# Altium PCB CZ201E_V2.0.PcbDoc
Units mm, origin at the board's own origin, x right, y up, seen from the top; angles counter-clockwise.
Board outline 58.8 x 55 mm, 2 copper layers (Top Layer, Bottom Layer); 61 components, 39 nets, 197 pads, 33 vias.
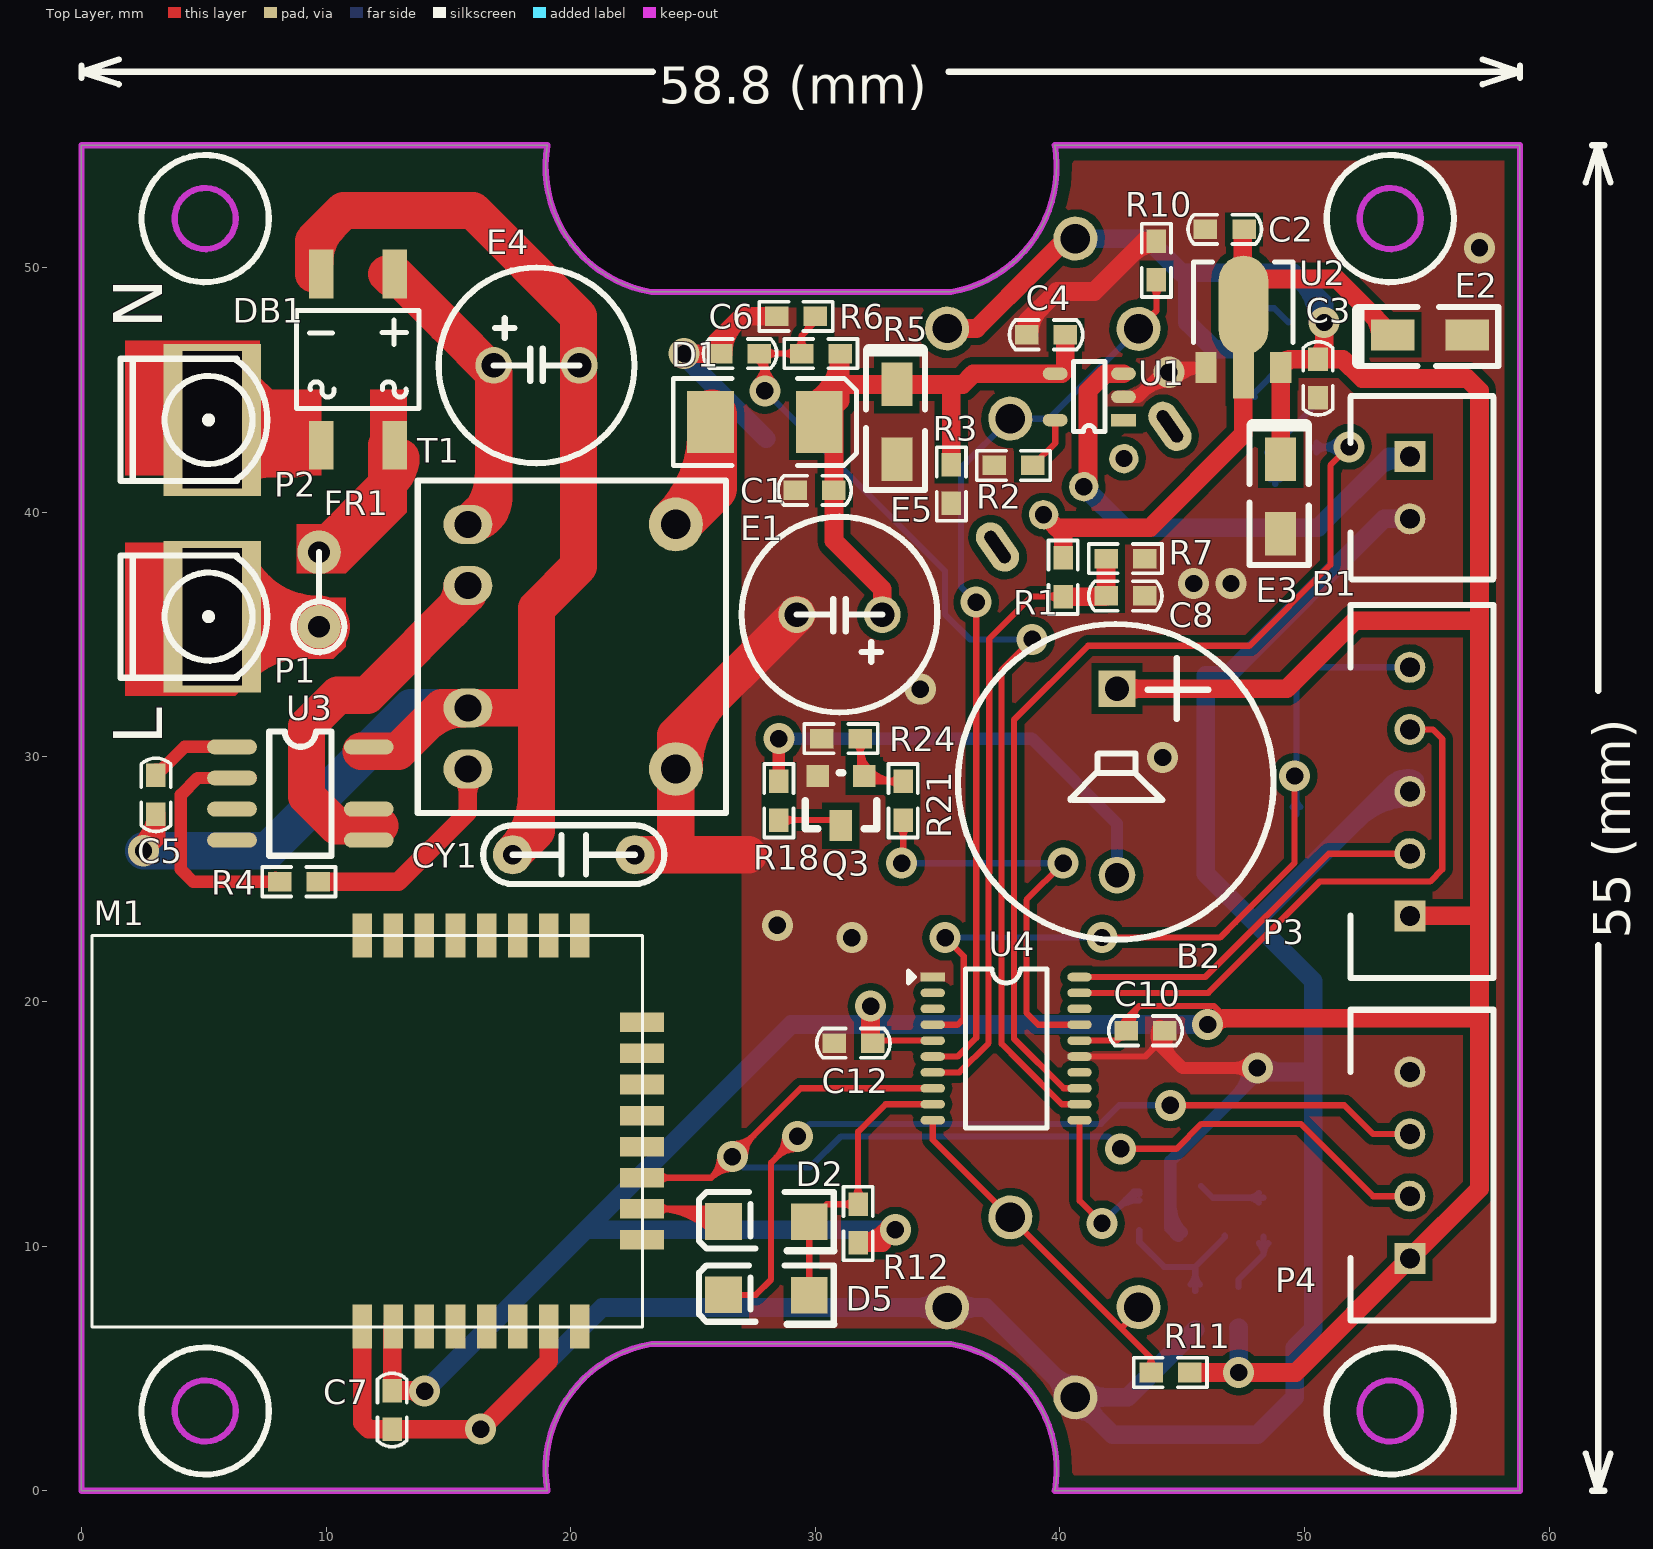
[diagram p0: Top Layer view]
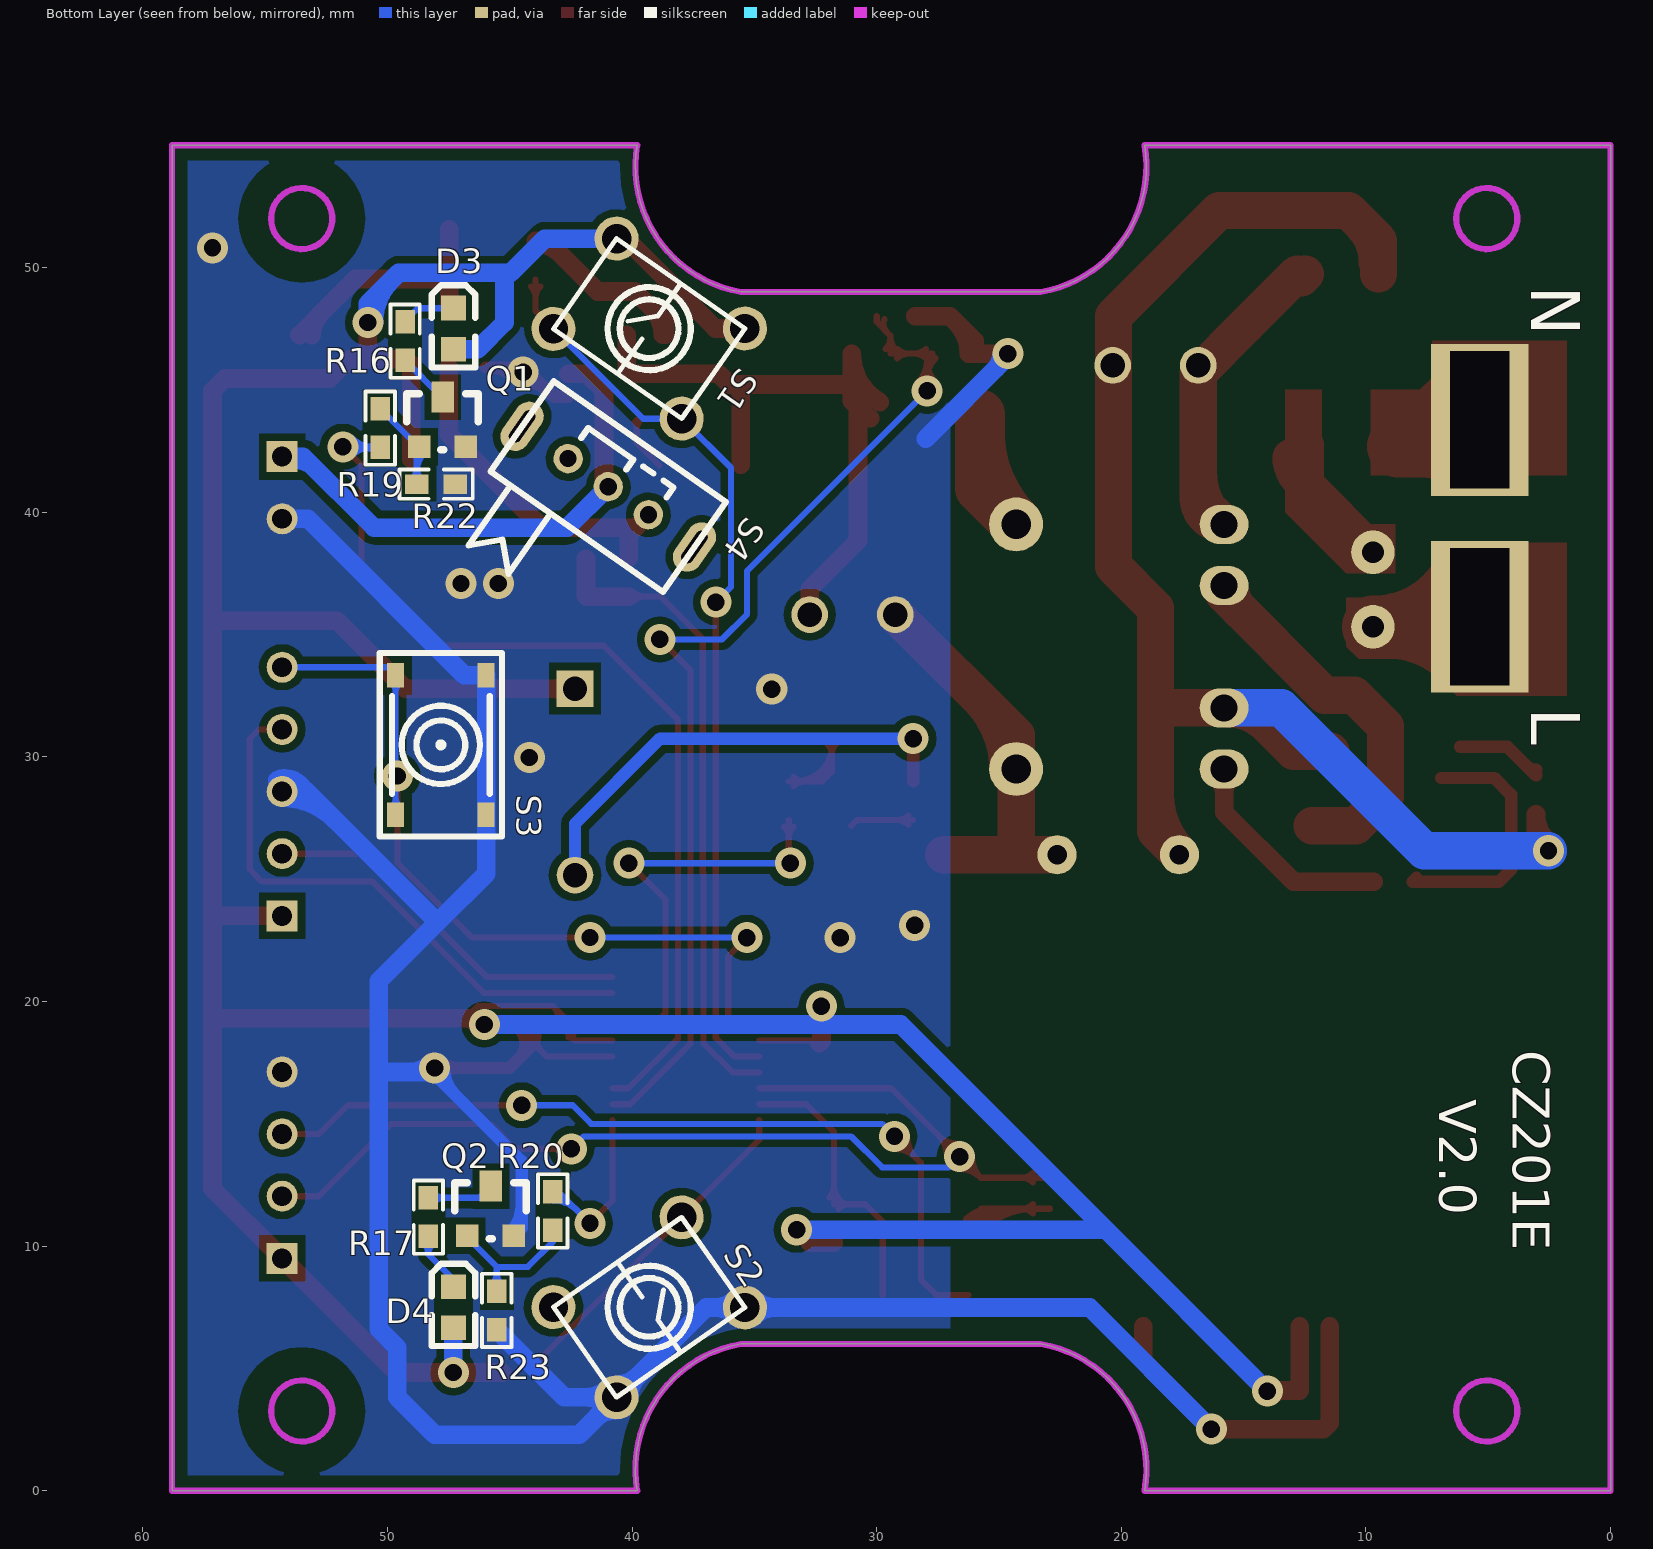
[diagram p1: Bottom Layer view, seen from below]

## Layer stack, top to bottom
Top Layer: signal copper 0.0356
Dielectric: dielectric 0.32, FR-4, Dk 4.8
Bottom Layer: signal copper 0.0356

## Board outline
0,0 0,55 19.05,55 ccw(c24.175,54.125) 23.3,49 35.54,49 ccw(c34.665,54.125) 39.79,55 39.8,55 58.8,55 58.8,0 39.8,0 39.79,0 ccw(c34.665,0.875) 35.54,6 23.3,6 ccw(c24.175,0.875) 19.05,0

## Design rules (kind name [scope] priority, off if disabled: settings)
Clearance "InPoygon to Keep-Out Layer" [InPolygon vs OnLayer('Keep-Out Layer')] p1: gap=0.5
Clearance "GND to Keep-Out Layer" [InNet('GND') vs OnLayer('Keep-Out Layer')] p2: gap=0.3
Clearance "GND to InPoygon" [InNet('GND') vs InPolygon] p3: gap=0.5
Clearance "InPoygon to All" [InPolygon] p4: gap=0.305
Clearance [All] p5: gap=0.254
HoleToHoleClearance [All] p1: gap=0 allowstackedmicrovias=TRUE
MinimumSolderMaskSliver [All] p1: minsoldermaskwidth=0
PolygonConnect IsVia [IsVia] p1: connectstyle=Direct reliefconductorwidth=0.254 reliefentries=4 polygonreliefangle="90 Angle"
PolygonConnect IsSMDPad [All] p2: connectstyle=Direct reliefconductorwidth=0.254 reliefentries=4 polygonreliefangle="90 Angle"
PolygonConnect [All] p3: connectstyle=Relief reliefconductorwidth=0.508 reliefentries=4 polygonreliefangle="90 Angle"
RoutingVias [All] p1: holewidth=0.711 width=1.27 viastyle="Through Hole" minholewidth=0.711 minwidth=1.27 maxholewidth=0.711 maxwidth=1.27
SilkToSilkClearance [All] p1: silktosilkclearance=0
SilkscreenOverComponentPads [All] p1: minsilkscreentomaskgap=0
SolderMaskExpansion [All] p1: expansion=0.102
Width [All] p1: maxlimit=2.54 minlimit=0.254 preferedwidth=0.254
24 further rules are at their usual default settings.

## Components (designator, comment, footprint, x,y, rotation, side; value= is the part's Value field where it differs from the comment)
B1 "3.7V" XH2.54-2P-BAT 54.3,41 r90 top locked
B2 "BUZZER" BEEZ 43.5,29 r0 top locked
C1 "100nF" 0603_CN 29.972,40.894 r180 top
C2 "100nF" 0603_CN 46.736,51.562 r180 top
C3 "100nF" 0603_CN 50.546,45.466 r270 top
C4 "100nF" 0603_CN 39.432,47.252 r180 top
C5 "1uF" 0603_CN 3.048,28.448 r270 top
C6 "100nF" 0603_CN 26.924,46.482 r180 top
C7 "100nF" 0603_CN 12.7,3.302 r90 top
C8 "100nF" 0603_CN 42.672,36.576 r0 top
C10 "100nF" 0603_CN 43.496,18.804 r0 top
C12 "100nF" 0603_CN 31.558,18.296 r180 top
CY1 "102M/1KV" CY-5MM 20.128,26 r0 top
D1 "SS24" DO-214AC(SMA) 27.94,43.688 r180 top
D2 "1N4148" LL-34 28,11 r0 top
D3 "Red" 0603_LED 47.3,47.5 r270 bottom locked
D4 "Green" 0603_LED 47.3,7.5 r270 bottom locked
D5 "1N4148" LL-34 28,8 r0 top
DB1 "MB10F" MB10F 11.3,46.236 r90 top
E1 "470uF/10V" CS_470uF/16V 30.988,35.814 r180 top
E2 "10uF/6.3V" 3216_E 55.118,47.244 r0 top
E3 "10uF/6.3V" 3216_E 49.022,40.64 r270 top
E4 "4.7uF/400V" CS_220uF/25V 18.604,46 r0 top
E5 "10uF/6.3V" 3216_E 33.336,43.696 r270 top
FR1 "10R/0.5W" R0.12L 9.714,35.314 r90 top
M1 "E18-MS1PA2-IPX" E18-MS1PA2-IPX 17.2,14.7 r180 top
P1 "L" CP3M-6*5*8.5MM 4.6,35.73 r270 top locked
P2 "N" CP3M-6*5*8.5MM 4.6,43.77 r270 top locked
P3 "SWD" XH2.54-5P 54.3,23.5 r90 top locked
P4 "ISP" XH2.54-4P 54.3,9.5 r90 top locked
Q1 "S8050" SOT-23 47.752,43.688 r180 bottom
Q2 "S8050" SOT-23 45.782,11.438 r180 bottom
Q3 "S8050" SOT-23 31.05,28.202 r180 top
R1 "1M" 0603_RN 40.132,37.338 r90 top
R2 "1.65K" 0603_RN 38.1,41.91 r0 top
R3 "1.2K" 0603_RN 35.56,41.148 r90 top
R4 "110K/1%" 0603_RN 8.89,24.892 r0 top
R5 "10K" 0603_RN 30.226,46.482 r0 top
R6 "20K" 0603_RN 29.21,48.006 r0 top
R7 "1M" 0603_RN 42.672,38.1 r180 top
R10 "100K" 0603_RN 43.942,50.292 r270 top
R11 "100K" 0603_RN 44.512,4.834 r0 top
R12 "100K" 0603_RN 31.75,10.922 r270 top
R16 "1K" 0603_RN 49.276,46.99 r90 bottom
R17 "1K" 0603_RN 48.322,11.184 r270 bottom
R18 "33R" 0603_RN 28.51,28.202 r90 top
R19 "10K" 0603_RN 50.292,43.434 r270 bottom
R20 "10K" 0603_RN 43.242,11.438 r90 bottom
R21 "10K" 0603_RN 33.59,28.202 r270 top
R22 "100K" 0603_RN 48.006,41.148 r0 bottom
R23 "100K" 0603_RN 45.528,7.374 r90 bottom
R24 "100K" 0603_RN 31.05,30.742 r0 top
S1 "SW-4" KEY-6*6MM-DIP 39.3,47.5 r215 bottom locked
S2 "SW-4" KEY-6*6MM-DIP 39.3,7.5 r325 bottom locked
S3 "SW-4" KEY-4*4*1.5MM-SMD 47.814,30.488 r90 bottom
S4 "SK12D07VG3" SK12D07VG3 41,41 r215 bottom locked
T1 "EE12.7 5+5(V)" "EE12.7 5+5(V)" 15.8,39.5 r0 top locked
U1 "TP4054" SOT-23-5 41.2,44.712 r180 top
U2 "HT7333-A" SOT-89 47.498,45.912 r0 top
U3 "LP3667B" SOP7 8.952,28.5 r0 top
U4 "STM32F030F4P6" TSSOP20 34.8,21 r0 top

## Footprints (in the part's own frame and the unit in brackets; to place one, negate y for a bottom-side part, rotate by r counter-clockwise, add the part's x,y. Pads: shape width x height; smd on the part's side, far side on the other; paste and mask are expansions set on the pad)
0603_CN [mm] "SMD Resistor"
  rect 0.96x0.8 smd: 1(-0.79,0) 2(0.79,0)
  silkscreen extent -1.5,-0.6 1.5,0.6
0603_LED [mil] "SMD LED"
  rect 40x40 smd: A(33,0) K(-33,0)
  silkscreen extent -70,-35 63,35
0603_RN [mm] "SMD Resistor"
  rect 0.96x0.8 smd: 1(-0.79,0) 2(0.79,0)
  silkscreen extent -1.5,-0.6 1.5,0.6
3216_E [mm] "SMD Tantalum Capacitor"
  rect 1.78x1.27 smd: 1(-1.525,0) 2(1.525,0)
  silkscreen extent -2.92,-1.27 2.79,1.14
BEEZ [mm]
  rect 1.5x1.5 hole 1: 1(-1.168,3.785)
  round 1.5 hole 1: 2(-1.168,-3.835)
  silkscreen extent -7.67,-6.48 5.23,6.43
CP3M-6*5*8.5MM [mm]
  rect 3x4 hole 2.4 square: 1(-1.6,0.75) 1(0,0.75) 1(1.6,0.75)
  silkscreen extent -2.5,-3 2.5,3
CS_220uF/25V [mm] "PTH  Electrolytic  Capacitor"
  round 1.5 hole 1: 1(-1.75,0) 2(1.75,0)
  silkscreen extent -4,-4 4,4
CS_470uF/16V [mm] "PTH  Electrolytic  Capacitor"
  round 1.5 hole 1: 1(-1.75,0) 2(1.75,0)
  silkscreen extent -4,-4 4,4
CY-5MM [mm]
  round 1.6 hole 0.8: 1(-2.5,0) 2(2.5,0)
  silkscreen extent -3.7,-1.2 3.7,1.2
DO-214AC(SMA) [mil] "SMD Diode"
  rect 75x100 smd: A(87.5,0) K(-87.5,0)
  silkscreen extent -147,-70 148,70
E18-MS1PA2-IPX [mm] "22.5mm*16mm*2.40mm-S"
  rect 0.8x1.8 smd: 1(5.716,7.987) 2(4.446,7.987) 3(3.176,7.987) 4(1.906,7.987) 5(0.636,7.987) 6(-0.634,7.987) 7(-1.904,7.987) 8(-3.174,7.987) 17(-3.174,-7.987) 18(-1.904,-7.987) 19(-0.634,-7.987) 20(0.636,-7.987) 21(1.906,-7.987) 22(3.176,-7.987) 23(4.446,-7.987) 24(5.716,-7.987)
  rect 1.8x0.8 smd: 9(-5.716,4.445) 10(-5.716,3.175) 11(-5.716,1.905) 12(-5.716,0.635) 13(-5.716,-0.635) 14(-5.716,-1.905) 15(-5.716,-3.175) 16(-5.716,-4.445)
  silkscreen extent -5.73,-8 16.77,8
"EE12.7 5+5(V)" [mm]
  oval 2x1.6 hole 1.1: 1(0,0) 2(0,-2.5) 4(0,-7.5) 5(0,-10)
  round 2.2 hole 1.2: 6(8.5,-10) 10(8.5,0)
  silkscreen extent -2.05,-11.8 10.55,1.8
KEY-4*4*1.5MM-SMD [mm] "SMD"
  rect 1x0.7 smd: 1(-2.85,1.85) 2(-2.85,-1.85) 3(2.85,-1.85) 4(2.85,1.85)
  silkscreen extent -3.75,-2.5 3.75,2.5
KEY-6*6MM-DIP [mm]
  round 1.8 hole 1.2: 1(-3.2,2.25) 2(-3.2,-2.25) 3(3.2,-2.25) 4(3.2,2.25)
  silkscreen extent -3.2,-2.25 3.2,2.25
LL-34 [mm] "SMD Diode"
  rect 1.5x1.5 smd: A(1.75,-0.008) K(-1.75,0.008)
  silkscreen extent -2.75,-1.19 2.75,1.21
MB10F [mm]
  rect 2x1 smd: 1(-3.5,1.5) 2(-3.5,-1.5) 3(3.5,-1.5) 4(3.5,1.5)
  silkscreen extent -2,-2.5 2,2.5
R0.12L [mil]
  round 70 hole 35: 1(0,0) 2(120,0)
  silkscreen extent -41,-41 120,41
SK12D07VG3 [mm]
  oval 1.2x2.2 hole 0.5 slot 1.5 at 90 deg: 0(-4.3,0.05) 0(4.3,0.05)
  round 1.2 hole 0.7: 1(-2,0.05) 2(0,0.05) 3(2,0.05)
  silkscreen extent -4.3,-5.2 4.3,2.3
SOP7 [mil]
  oval 80x24 smd: 1(-110,75) 2(-110,25) 3(-110,-25) 4(-110,-75) 5(110,-75) 6(110,-25) 7(110,75)
  silkscreen extent -50,-100 50,100
SOT-23 [mil] "SMD Triode Or Diode"
  rect 36x36 smd: 1(-37.5,-40) 2(37.5,-40)
  rect 36x50 smd: 3(0.5,40)
  silkscreen extent -58,-45 58,45
SOT-23-5 [mil]
  rect 40x20 smd: 1(-55,37.4)
  oval 40x20 smd: 2(-55,0) 3(-55,-37.4) 4(55,-37.4) 5(55,37.4)
  silkscreen extent -25,-57 26,55
SOT-89 [mil] "SMD Diode"
  rect 34x50 smd: 1(-60,0) 3(60,0)
  rect 34x100 smd: 2(0,0)
  oval 80x160 smd: 2(0,100)
  silkscreen extent -80,40 80,170
TSSOP20 [mm]
  rect 1x0.35 smd: 1(0,0)
  oval 1x0.35 smd: 2(0,-0.65) 3(0,-1.3) 4(0,-1.95) 5(0,-2.6) 6(0,-3.25) 7(0,-3.9) 8(0,-4.55) 9(0,-5.2) 10(0,-5.85) 11(6,-5.85) 12(6,-5.2) 13(6,-4.55) 14(6,-3.9) 15(6,-3.25) 16(6,-2.6) 17(6,-1.95) 18(6,-1.3) 19(6,-0.65) 20(6,0)
  silkscreen extent -1,-6.17 4.67,0.33
XH2.54-2P-BAT [mil]
  rect 50x50 hole 32: 1(50,0)
  round 50 hole 32: 2(-50,0)
  silkscreen extent -148,-135 148,95
XH2.54-4P [mil]
  rect 50x50 hole 32: 1(0,0)
  round 50 hole 32: 2(100,0) 3(200,0) 4(300,0)
  silkscreen extent -100,-135 400,95
XH2.54-5P [mil]
  rect 50x50 hole 32: 1(0,0)
  round 50 hole 32: 2(100,0) 3(200,0) 4(300,0) 5(400,0)
  silkscreen extent -100,-135 500,95

## Part data
B1: library part BATTERY
C1 C2 C3 C4 C5 C6 C7 C8 C10 C12 CY1: library part Cap1
D1: library part Diode-A, "SS14,SS24,SS34,M7"
D2 D5: library part Diode-B
D3 D4: library part LED
E1 E4: library part "Cap Pol1"
E2 E3 E5: library part "Cap Ta"
FR1 R1 R2 R3 R4 R5 R6 R7 R10 R11 R12 R16 R17 R18 R19 R20 R21 R22 R23 R24: library part Res1
P1 P2: library part "Header 1", "Header, 1-Pin"
P4: library part ISP_UART
Q1 Q2 Q3: library part 8050
U1: library part QX4054, "TP4054,LTC4054 ,PJ4054MR"
U2: library part HT7833, "HT7533; Output 500mA; Iq: 5uA, max= 7uA"
U3: "LP3667A, LP3667B, LP3667AH, LP3667BH"

## Via types
v1: diameter 1.27, hole 0.711, Top Layer to Bottom Layer, 33 vias

## Nets (pads, with @x,y where several pads share a name; then routed paths per layer and width w, separated by ;. In a path a pad name is that pad's centre, name@x,y a point inside that pad or via, vN(x,y) a via of type N, cw(c..) or ccw(c..) an arc to the next point about the centre after c; other vN are vias at no path point)
+3.3V: B2.1 C3.1 C7.2 C10.1 C12.1 D3.A D4.A E3.1 M1.2 P3.1 P4.1 R11.2 R12.2 S1.1 S1.4 U2.3 U4.5 U4.16 | length 193.4
  Top Layer w0.254: C12.1@32.292,18.296 C12.1 32.452,18.4 U4.5 ; U4.16 42.33,18.4 C10.1@42.706,18.776 ; C10.1@42.402,18.649 cw(c42.276,18.562) 42.384,18.454 cw(c42.576,18.262) C10.1@42.601,18.532 ; C10.1@42.566,18.722 cw(c43.044,18.9) 42.683,19.261 ; C10.1@42.566,19.039 ccw(c42.421,19.284) 42.706,19.284 ; C10.1 42.706,19.284 ; C10.1@42.804,18.811 cw(c43.451,19.052) 42.963,19.541 ; C10.1@42.846,19.039 cw(c42.991,19.284) 42.706,19.284 ; C10.1@43.042,18.899 cw(c43.858,19.204) 43.242,19.82 ; 46.798,19.312 46.29,19.82 43.242,19.82 ; 42.706,19.284 43.242,19.82
  Top Layer w0.762: M1.2@12.7,6.713 12.7,4.1 v1@14.004,4.1 ; 13.351,4.1 cw(c13.351,3.391) v1@13.852,3.892 ; v1(32.258,19.812) 32.258,18.386 C12.1 ; 32.738,10.132 R12.2 ccw(c31.75,11.743) v1@33.066,10.814 ; S1.4 36.586,47.508 39.116,50.038 40.257,51.179 S1.1 ; B2.1 49.276,32.785 52.051,35.56 57.15,35.56 ; B2.1@42.593,32.524 cw(c43.222,31.894) 43.222,32.785 cw(c43.222,33.675) B2.1@42.593,33.046 ; R11.2 v1(47.306,4.834) 49.634,4.834 P4.1 57.15,12.35 57.15,19.312 ; v1@46.27,18.96 cw(c46.798,18.741) 46.798,19.312 57.15,19.312 ; E3.1 U2.3 49.365,46.256 C3.1 ; U2.3@49.058,46.08 cw(c49.483,45.654) 49.483,46.256 ; C3.1@50.533,46.349 ccw(c49.887,46.995) 50.8,46.995 ; v1(50.8,47.752) 50.8,46.51 C3.1 ; P3.1 57.15,23.5 ; C3.1 51.562,46.256 52.352,45.466 56.642,45.466 57.15,44.958 57.15,35.56 ; 57.15,19.312 57.15,23.5 ; 57.15,23.5 57.15,35.56
  Bottom Layer w0.762: v1(14.032,4.072) 20.603,10.643 ; v1(33.274,10.668) 20.628,10.668 29.018,19.058 v1(46.036,19.058) ; S1.1 43.563,51.179 44.958,49.784 49.53,49.784 50.8,48.514 v1(50.8,47.752) ; 45.212,49.53 45.212,47.752 46.302,46.662 D3.A ; D4.A 47.306,6.656 v1(47.306,4.834) ; 49.828,49.486 cw(c48.093,47.752) v1@50.546,47.752
+5V: C1.1 C4.1 D1.K E1.1 E5.1 R3.2 R5.2 U1.4 | length 29.5
  Top Layer w0.762: D1.K@29.875,44.5 ccw(c28.723,46.482) R5.2 31.016,44.542 30.762,44.288 C1.1 30.762,38.834 32.738,36.858 E1.1 ; D1.K@30.258,43.841 ccw(c29.493,45.158) 31.016,45.158 ; 31.261,45.221 E5.1 35.56,45.221 ; R3.2 35.56,45.221 ; C4.1 40.222,45.817 40.067,45.662 U1.4 38.862,45.662 36.462,45.662 36.021,45.221 35.56,45.221
+BAT: B1.1 S4.2 U1.3 | length 23
  Top Layer w0.762: S4.2 41.148,41.218 41.148,44.958 41.852,45.662 U1.3
  Bottom Layer w0.762: S4.2 42.642,39.37 46.482,39.37 ; 47.244,39.37 46.482,39.37 ; 53.019,41.843 cw(c53.744,41.118) B1.1@54.19,42.041 ; B1.1 53.446,42.27 50.546,39.37 46.482,39.37
+BAT_OUT: C2.1 E2.1 R1.2 S4.3 U2.2 | length 25.2
  Top Layer w0.762: S4.3 39.857,39.37 ; R1.2 40.132,39.095 39.857,39.37 ; C2.1@47.47,51.562 U2.2@47.47,49.53 ; U2.2@47.498,45.913 47.498,43.18 43.688,39.37 41.402,39.37 39.857,39.37 ; U2.2@47.498,48.452 47.47,48.48 U2.2@47.47,49.53 ; 52.723,48.115 cw(c51.853,47.244) E2.1@53.084,47.244 ; E2.1 52.324,48.514 51.308,49.53 U2.2@47.47,49.53
BAT_VOL: C8.1 R1.1 R7.2 U4.7 | length 27.4
  Top Layer w0.254: U4.7 35.882,17.1 37.084,18.302 37.084,25.233 37.105,25.254 37.105,33.274 37.105,34.036 37.105,34.819 38.834,36.548 R1.1 ; R1.1@39.939,36.355 ccw(c39.473,35.889) 39.473,36.548 ccw(c39.473,37.207) R1.1@39.939,36.741
  Top Layer w0.762: R1.1 41.854,36.548 C8.1 R7.2
BUZZER: R21.2 U4.17 | length 18.5
  Top Layer w0.254: R21.2@33.397,27.139 cw(c32.931,26.673) 33.59,26.673 cw(c34.249,26.673) R21.2@33.783,27.139 ; v1(33.528,25.654) 33.59,25.716 R21.2 ; v1(40.132,25.654) 38.629,24.151 38.629,19.537 39.116,19.05 U4.17
  Bottom Layer w0.254: v1(33.528,25.654) v1(40.132,25.654)
E18_UART_RX: D2.K M1.10 | length 12
  Top Layer w0.254: M1.10 25.733,11.525 D2.K ; M1.10@23.497,11.525 cw(c23.497,8.254) D2.K@25.809,10.567 ; M1.10@23.609,11.332 cw(c24.075,10.866) 24.075,11.525 cw(c24.075,12.184) M1.10@23.609,11.718 ; 24.11,11.525 cw(c24.11,8.868) D2.K@25.989,10.747 ; 24.723,11.525 cw(c24.723,9.481) D2.K@26.169,10.926 ; 25.336,11.525 cw(c25.336,10.094) D2.K@26.348,11.106
GND: B1.2 C1.2 C2.2 C3.2 C4.2 C6.2 C7.1 C8.2 C10.2 C12.2 CY1.2 E1.2 E2.2 E3.2 E5.2 M1.1 M1.7 P3.3 P4.4 Q1.2 Q2.2 Q3.2 R2.1 R3.1 R6.1 R7.1 R10.1 R22.1 R23.1 R24.1 S2.1 S2.4 S3.2 S3.3 T1.6 U1.2 U2.1 U4.1 U4.15 | length 201.3
  Top Layer w0.254: U4.15 43.486,17.75 44.014,18.278 C10.2@44.286,18.55 ; 43.653,17.917 ccw(c42.946,18.624) C10.2@43.936,18.765 ; 44.012,18.276 ccw(c43.575,18.714) C10.2@44.187,18.801
  Top Layer w0.508: U1.2 43.188,44.712 44.389,45.913 U2.1 ; U1.2@42.851,44.712 ccw(c42.851,45.526) 43.426,44.95 ; 43.366,44.89 cw(c44.45,43.806) v1@44.45,45.339 ; 44.014,18.278 45.012,17.28 v1(48.068,17.28) ; C10.2@44.069,19.012 ccw(c44.623,18.624) 44.145,18.147 ; C10.2@44.486,18.72 ccw(c45.126,18.272) 44.573,17.719 ; v1@44.719,45.451 cw(c45.835,44.335) U2.1@45.835,45.913 ; v1@47.799,17.011 ccw(c47.148,16.36) 47.148,17.28 ccw(c47.148,18.2) v1@47.799,17.549
  Top Layer w0.762: M1.1 11.484,2.782 11.746,2.52 v1(16.318,2.52) 19.104,5.306 M1.7 ; v1(24.638,46.482) C6.2 26,46.616 26,47 27.006,48.006 R6.1 ; C6.2@26.233,46.482 cw(c28.046,46.482) 26.764,47.764 ; C4.2@38.642,47.282 C4.2 38.642,47.786 39.878,49.022 41.402,49.022 43.462,51.082 R10.1 ; C4.2@38.741,47.252 cw(c40.269,47.252) 39.189,48.333 ; 42.954,50.574 cw(c43.942,49.585) R10.1@43.942,50.983 ; 43.222,50.842 cw(c43.79,50.274) R10.1@43.938,51.063
  Top Layer w1.524: CY1.2 24.384,26 ; T1.6@24.638,29.5 cw(c28.776,29.5) 25.85,32.426 ; 27.27,26 24.384,26 ; E1.2 24.3,30.876 T1.6 24.3,26.084 24.384,26
  Bottom Layer w0.508: 44.512,11.679 ccw(c46.087,11.679) Q2.2@44.973,10.566 ; Q2.2 44.512,10.74 44.512,13.47 v1@48.068,17.026 ; 47.238,16.196 ccw(c46.154,17.28) v1@47.687,17.28
  Bottom Layer w0.762: v1(16.318,2.52) v1(16.318,2.52) 21.292,7.492 S2.1 36.96,7.492 S2.4 ; v1(24.638,46.482) 24.638,46.362 28,43 ; v1@24.892,46.482 ccw(c25.795,46.482) 25.156,45.844 ; S2.1@35.021,7.125 ccw(c34.135,6.239) 34.135,7.492 ccw(c34.135,8.745) S2.1@35.021,7.859 ; S2.1@35.755,7.125 cw(c36.641,6.239) 36.641,7.492 cw(c36.641,8.745) S2.1@35.755,7.859 ; S2.4@40.112,3.821 ccw(c38.859,3.821) 39.745,4.707 ccw(c40.631,5.593) S2.4@40.631,4.34 ; S2.4@40.631,3.302 cw(c40.631,2.049) 41.517,2.935 cw(c42.403,3.821) S2.4@41.15,3.821 ; S2.4@40.998,3.454 cw(c41.884,2.568) 41.884,3.821 cw(c41.884,5.074) S2.4@40.998,4.188 ; R23.1 42.765,3.821 S2.4 ; v1@48.068,17.026 48.162,17.12 50.354,17.12 ; v1@48.248,17.46 ccw(c49.067,18.279) 49.067,17.12 ; 52.159,27.439 cw(c54.3,25.299) P3.3@54.3,28.326 ; 52.8,28.08 cw(c53.696,27.184) P3.3@54.199,28.347 ; 53.46,28.74 cw(c54.3,27.9) P3.3@54.3,29.088 ; 53.593,28.873 cw(c54.175,28.291) P3.3@54.502,29.046 ; P3.3 53.3,28.58 47.974,23.254 47.974,23.216 ; B1.2 53.246,39.73 46.854,33.338 S3.3 S3.2 45.964,25.226 47.974,23.216 ; S2.4 42.158,2.294 48.068,2.294 49.592,3.818 49.592,5.85 50.354,6.612 50.354,17.12 ; 47.974,23.216 50.354,20.836 50.354,17.12
  other v1: 31.496,22.606 28.448,23.114 44.196,29.972 34.29,32.766 45.466,37.084 46.99,37.084 44.45,45.72 57.15,50.8
GND_P: C5.2 CY1.1 DB1.4 E4.2 T1.4 U3.7 | length 70.5
  Top Layer w0.762: v1@2.391,26.367 ccw(c1.453,27.658) C5.2 3.048,26.67 v1(2.54,26.162)
  Top Layer w1.524: DB1.4@9.484,49.736 9.484,51.086 10.73,52.332 15.994,52.332 20.32,48.006 20.32,43.942 20.32,37.784 18.604,36.068 18.604,32 ; DB1.4@9.538,50.236 cw(c11.72,50.236) 10.177,51.779 ; U3.7@11.43,30.226 12.954,30.226 14.728,32 T1.4 18.604,32 ; 14.047,31.319 cw(c15.6,29.765) T1.4@15.6,31.962 ; CY1.1@17.601,26.027 ccw(c15.18,28.448) 18.604,28.448 ; CY1.1 18.604,26.976 18.604,32
  Bottom Layer w1.524: v1(2.54,26.162) 7.624,26.162 13.462,32 T1.4
ISP_UART_RX: D5.K P4.3 | length 36.5
  Top Layer w0.254: D5.K 27.566,8.008 28.194,8.636 28.194,13.408 v1(29.272,14.486) ; v1@28.764,14.486 cw(c27.538,14.486) 28.405,13.619 cw(c29.272,12.752) v1@29.272,13.978 ; v1(44.512,15.756) 51.624,15.756 52.8,14.58 P4.3
  Bottom Layer w0.254: v1(29.272,14.486) 29.78,14.994 41.664,14.994 42.426,15.756 v1(44.512,15.756)
KEY1: R10.2 S1.2 S1.3 U4.6 | length 38.6
  Top Layer w0.254: U4.6 35.814,17.75 36.576,18.512 v1(36.576,36.322) ; S1.2@43.214,47.495 S1.2 43.942,48.223 R10.2 ; R10.2@43.749,49.229 cw(c43.283,48.763) 43.942,48.763 cw(c44.601,48.763) R10.2@44.135,49.229
  Bottom Layer w0.254: v1(36.576,36.322) 35.954,36.944 35.954,41.806 S1.3 39.541,43.821 S1.2
KEY2: R11.1 S2.2 S2.3 U4.10 | length 16
  Top Layer w0.254: U4.10 34.8,14.348 S2.2 42.508,6.64 ; S2.3 43.212,7.344 42.508,6.64 ; R11.1@43.545,5.042 ccw(c43.217,5.426) 43.722,5.426 ; R11.1 43.722,5.426 ; R11.1@43.899,5.042 cw(c44.227,5.426) 43.722,5.426 ; 42.508,6.64 43.722,5.426
L: FR1.1 P1.1 | length 16.3
  Top Layer w2.54: P1.1@3.843,36.187 ccw(c5.344,37.042) P1.1@5.344,35.314 ; P1.1@5.05,35.73 5.466,35.314 FR1.1 cw(c9.714,39.53) P1.1@6.05,37.444 ; P1.1@6.013,33.967 cw(c9.264,30.716) FR1.1@9.264,35.314 ; P1.1@6.013,35.893 ccw(c7.41,37.29) 7.41,35.314
LED1: R19.2 U4.13 | length 42.3
  Top Layer w0.254: U4.13 40.148,16.45 38.121,18.477 38.121,31.517 41.148,34.544 47.752,34.544 51.054,37.846 51.054,41.91 v1(51.816,42.672)
  Bottom Layer w0.254: R19.2 51.788,42.644 v1(51.816,42.672) ; R19.2@50.485,42.451 cw(c50.951,41.985) 50.951,42.644 cw(c50.951,43.303) R19.2@50.485,42.837 ; R19.2@50.522,42.644 ccw(c50.522,43.966) v1@51.457,43.031 ; R19.2@50.657,42.644 cw(c50.657,41.513) v1@51.457,42.313 ; 51.135,42.644 ccw(c51.135,43.353) v1@51.636,42.852
LED2: R20.2 U4.11 | length 8.4
  Top Layer w0.254: U4.11 40.8,11.848 v1(41.718,10.93)
  Bottom Layer w0.254: v1(41.718,10.93) 43.016,12.228 R20.2 ; 42.254,11.466 cw(c43.242,10.477) R20.2@43.242,11.875 ; 42.687,11.899 cw(c43.242,11.344) R20.2@43.242,12.129
N: DB1.1 P2.1 | length 8.9
  Top Layer w2.54: P2.1@5.05,43.77 6.14,42.68 8.698,42.68 cw(c8.698,46.182) P2.1@6.026,43.919 ; P2.1@6.013,42.007 cw(c7.637,40.383) 7.637,42.68
NetB2_2: B2.2 R18.2 | length 19.4
  Top Layer w0.508: R18.2 v1(28.51,30.742)
  Bottom Layer w0.508: v1@28.256,30.488 v1@28.51,30.488 ; v1(28.51,30.742) 30.988,30.742 33.336,30.742 38.854,30.742 42.332,27.264 B2.2
NetC5_1: C5.1 U3.1 | length 4
  Top Layer w0.508: C5.1 4.215,30.405 4.572,30.405 U3.1 ; C5.1@3.048,29.464 ccw(c3.048,30.01) C5.1@3.434,29.624
NetD1_A: D1.A T1.10 | length 9.2
  Top Layer w2.032: T1.10@24.241,39.559 ccw(c20.525,43.275) D1.A@25.78,43.275 ; T1.10 25.78,40.979 D1.A@25.78,44
NetD3_K: D3.K R16.2 | length 2.4
  Bottom Layer w0.254: D3.K@47.37,48.268 D3.K 48.76,48.338 49.297,47.801 R16.2@49.338,47.76
NetD4_K: D4.K R17.2 | length 3.5
  Bottom Layer w0.254: D4.K 47.3,8.638 48.322,9.66 ; R17.2@48.13,10.12 cw(c47.675,9.66) 48.322,9.66 ; R17.2 48.322,9.66 ; R17.2@48.514,10.12 ccw(c48.969,9.66) 48.322,9.66
NetDB1_2: DB1.2 FR1.2 | length 6.5
  Top Layer w1.524: FR1.2 12.484,41.132 DB1.2@12.484,42.736 ; 12.69,41.338 ccw(c11.792,42.236) DB1.2@13.062,42.236
NetDB1_3: DB1.3 E4.1 T1.1 | length 16.5
  Top Layer w1.524: DB1.3@12.484,49.736 DB1.3@12.642,49.578 ; DB1.3 14.885,47.651 16.854,45.682 16.854,40.554 ; T1.1 16.854,40.554 ; T1.1@15.973,39.527 ccw(c13.847,41.653) 16.854,41.653 ; T1.1@15.994,39.537 ccw(c15.823,40.554) 16.854,40.554 ; 16.854,45.22 E4.1@16.854,45.366
NetQ1_1: Q1.1 R19.1 R22.2 | length 6
  Bottom Layer w0.254: Q1.1@48.471,42.439 cw(c47.686,41.654) 48.796,41.654 ; R22.2@48.603,41.341 ccw(c48.137,41.807) 48.796,41.807 ccw(c49.455,41.807) R22.2@48.989,41.341 ; R22.2 48.796,42.728 R19.1 ; 48.796,42.096 cw(c49.281,42.096) Q1.1@48.938,42.439
NetQ1_3: Q1.3 R16.1 | length 2.3
  Bottom Layer w0.254: Q1.3 Q1.3@47.78,44.704 ; Q1.3@47.97,44.704 Q1.3@47.78,44.704 ; R16.1 Q1.3@47.78,44.704
NetQ2_1: Q2.1 R20.1 R23.2 | length 7
  Bottom Layer w0.254: R20.1 43.242,10.168 44.258,9.152 45.528,9.152 ; R23.2@45.335,8.437 ccw(c44.869,8.903) 45.528,8.903 ccw(c46.187,8.903) R23.2@45.721,8.437 ; R23.2 45.528,9.152 ; Q2.1 46.735,10.359 45.528,9.152
NetQ2_3: Q2.3 R17.1 | length 3.8
  Bottom Layer w0.254: Q2.3 46.249,11.974 R17.1 ; R17.1@48.129,11.781 ccw(c47.663,11.315) 47.663,11.974 ccw(c47.663,12.633) R17.1@48.129,12.167
NetQ3_1: Q3.1 R21.1 R24.2 | length 9
  Top Layer w0.254: R24.2@31.647,30.549 cw(c31.181,30.083) 31.84,30.083 cw(c32.499,30.083) R24.2@32.033,30.549 ; 31.84,29.794 ccw(c32.579,29.794) 32.056,29.272 ccw(c32.732,29.948) 32.732,28.992 ; R24.2@31.84,30.407 ccw(c33.192,30.407) 32.236,29.451 ccw(c33.345,30.561) R21.1@33.345,28.992 ; R24.2 31.84,29.381 32.229,28.992 R21.1 ; R21.1@33.397,28.799 ccw(c32.931,28.333) 32.931,28.992 ccw(c32.931,29.651) R21.1@33.397,29.185
NetQ3_3: Q3.3 R18.1 | length 3.7
  Top Layer w0.254: R18.1 30.811,27.412 Q3.3 ; R18.1@28.703,27.219 cw(c29.169,26.753) 29.169,27.412 cw(c29.169,28.071) R18.1@28.703,27.605
NetR2_2: R2.2 U1.5 | length 2.7
  Top Layer w0.254: R2.2 39.803,42.823 U1.5 ; U1.5@39.713,43.672 cw(c39.496,43.455) 39.803,43.455 cw(c40.11,43.455) U1.5@39.893,43.672
NetR4_1: R4.1 U3.2 | length 10.7
  Top Layer w0.508: U3.2@6.933,29.135 U3.2 4.751,29.135 4.064,28.448 4.064,25.4 4.572,24.892 R4.1 R4.1@7.936,25.056
NetR4_2: R4.2 T1.5 | length 10.6
  Top Layer w0.762: R4.2 12.954,24.892 15.8,27.738 T1.5 ; T1.5@15.504,29.204 cw(c14.788,28.488) 15.8,28.488 cw(c16.812,28.488) T1.5@16.096,29.204
NetT1_2: T1.2 U3.5 U3.6 | length 16.7
  Top Layer w1.524: 12.192,27.178 10.414,27.178 9.206,28.386 9.206,31.25 10.476,32.52 11.684,32.52 15.8,36.636 T1.2 ; 15.136,35.972 ccw(c14.109,37) T1.2@15.562,37
NRST: P3.5 S3.1 S3.4 U4.4 | length 38.5
  Top Layer w0.254: U4.4 35.814,19.05 36.068,19.304 36.068,21.844 v1(35.306,22.606) ; v1(41.718,22.614) 46.544,22.614 47.171,23.241 ; 46.798,22.868 47.171,23.241 ; v1(49.592,29.218) 49.592,25.662 47.171,23.241
  Bottom Layer w0.254: v1(35.306,22.606) 35.314,22.614 37.084,22.614 ; 36.13,22.614 37.084,22.614 ; v1(41.718,22.614) 37.084,22.614 ; S3.1@49.506,27.946 ccw(c49.126,28.326) 49.664,28.326 ccw(c50.202,28.326) S3.1@49.822,27.946 ; S3.4@49.506,33.03 cw(c49.126,32.65) 49.664,32.65 cw(c50.202,32.65) S3.4@49.822,33.03 ; S3.1 S3.4 49.986,33.66 52.07,33.66 ; 52.8,33.66 52.07,33.66 ; P3.5 53.594,33.66 52.07,33.66
PWR_STATE: C6.1 R5.1 R6.2 U4.12 | length 51.5
  Top Layer w0.254: v1@27.581,45.317 ccw(c26.714,46.184) 27.94,46.184 ccw(c29.166,46.184) v1@28.299,45.317 ; C6.1@27.601,46.289 cw(c26.782,45.47) v1@27.94,45.47 ; C6.1@27.781,46.469 cw(c27.396,46.084) C6.1@27.94,46.084 ; v1(27.94,44.958) 27.94,46.256 C6.1 R5.1 29.436,47.216 30,47.78 R6.2 ; C6.1@27.987,46.289 cw(c28.453,45.823) 28.453,46.482 cw(c28.453,47.141) C6.1@27.987,46.675 ; R5.1@29.163,46.289 ccw(c28.697,45.823) 28.697,46.482 ccw(c28.697,47.141) R5.1@29.163,46.675 ; R5.1@29.243,46.675 ccw(c28.777,47.141) 29.436,47.141 ccw(c30.095,47.141) R5.1@29.629,46.675 ; 29.589,47.369 ccw(c29.271,47.687) R6.2@29.675,47.886 ; 37.613,26.162 37.613,27.178 ; v1(38.862,34.798) 37.613,33.549 37.613,27.178 ; 39.116,16.764 38.354,17.526 ; U4.12 40.08,15.8 38.354,17.526 ; 37.613,27.178 37.613,18.267 38.354,17.526
  Bottom Layer w0.254: v1(27.94,44.958) 35.306,37.592 35.306,35.814 36.322,34.798 v1(38.862,34.798)
SWCLK: P3.2 U4.20 | length 15.6
  Top Layer w0.254: U4.20 45.946,21 50.986,26.04 P3.2
SWDIO: P3.4 U4.19 | length 23.9
  Top Layer w0.254: U4.19 46.058,20.35 50.608,24.9 55.126,24.9 55.626,25.4 55.626,30.734 55.24,31.12 P3.4 ; P3.4@54.04,31.12 P3.4@54.17,30.99
UART_RX: D2.A D5.A R12.1 U4.9 | length 13.8
  Top Layer w0.254: D5.A D2.A 30.47,11.712 R12.1 31.75,14.678 32.872,15.8 U4.9 ; R12.1@31.557,11.519 ccw(c31.091,11.053) 31.091,11.712 ccw(c31.091,12.371) R12.1@31.557,11.905 ; R12.1@31.557,11.985 ccw(c31.091,12.451) 31.75,12.451 ccw(c32.409,12.451) R12.1@31.943,11.985
UART_TX: M1.11 P4.2 U4.8 | length 47.9
  Top Layer w0.254: M1.11 25.749,12.795 ; M1.11@23.609,12.602 cw(c24.075,12.136) 24.075,12.795 cw(c24.075,13.454) M1.11@23.609,12.988 ; v1@26.104,13.656 cw(c24.892,13.652) 25.749,12.795 ; v1@26.61,13.15 ccw(c26.606,11.938) 25.749,12.795 ; v1@26.612,14.166 ccw(c26.612,15.393) 27.479,14.525 ccw(c28.347,13.658) v1@27.12,13.658 ; U4.8 33.782,16.45 29.404,16.45 27.94,14.986 v1(26.612,13.658) 25.749,12.795 ; v1(42.48,13.978) 44.766,13.978 45.782,14.994 49.846,14.994 52.8,12.04 P4.2
  Bottom Layer w0.254: v1@27.054,13.216 29.464,13.216 29.78,13.216 31.05,14.486 41.972,14.486 v1(42.48,13.978)
pads on no net: M1.3 M1.4 M1.5 M1.6 M1.8 M1.9 M1.12 M1.13 M1.14 M1.15 M1.16 M1.17 M1.18 M1.19 M1.20 M1.21 M1.22 M1.23 M1.24 S4.0 S4.1 U1.1 U3.3 U3.4 U4.2 U4.3 U4.14 U4.18

## Polygon pours and split planes (outlines as drawn)
GND on Top Layer "Bot Layer-No Net" (solid, remove dead copper, pour order 1000): 58.8,55 58.8,0 27,0 27,55 58.8,55
GND on Bottom Layer "Bot Layer-No Net" (solid, remove dead copper, pour order 1001): 58.8,55 58.8,0 27,0 27,55 58.8,55

## Keep-outs
Keep-Out Layer:
  circle w0.254: c53.5,3.26 r1.25
  circle w0.254: c5.06,3.26 r1.25
  circle w0.254: c5.06,52 r1.25
  circle w0.254: c53.5,52 r1.25
  lines w0.254: 39.79,0 ccw(c34.665,0.875) 35.54,6 23.3,6 ccw(c24.175,0.875) 19.05,0 0,0 0,55 19.05,55 ccw(c24.175,54.125) 23.3,49 35.54,49 ccw(c34.665,54.125) 39.79,55 ; 39.8,0 58.8,0 58.8,55 39.8,55

## Other copper
Top Layer:
  region net NetDB1_2: 11.8,45 11.8,41.5 9.8,39.5 8.8,39.5 8.8,37.5 10.8,37.5 13.3,40 13.3,45
  region net L: 1.8,38.75 7.05,38.75 7.3,38.5 7.3,37.5 8.3,36.5 10.8,36.5 10.8,34.5 10.3,34 7.8,34 6.3,32.5 1.8,32.5
  region net N: 1.8,47 7.3,47 7.3,45.5 7.8,45 9.8,45 9.8,41.5 1.8,41.5
Multi-Layer:
  pour cut-out: 53.5,49.4 cw(c53.5,52) 50.9,52 cw(c53.5,52) 53.5,54.6 cw(c53.5,52) 56.1,52 cw(c53.5,52)
  pour cut-out: 50.9,3.26 ccw(c53.5,3.26) 53.5,0.66 ccw(c53.5,3.26) 56.1,3.26 ccw(c53.5,3.26) 53.5,5.86 ccw(c53.5,3.26)

## Silkscreen, mask and mechanical layers (free items; w line width, h text height)
Top Overlay:
  circle w0.254: c5.06,3.26 r2.6
  circle w0.254: c53.5,52 r2.6
  circle w0.254: c5.06,52 r2.6
  circle w0.254: c53.5,3.26 r2.6
  lines w0.254: 0,57.746 0,58.254 ; 1.524,57.492 0,58 ; 1.524,58.508 0,58 ; 23.352,58 0,58 ; 35.448,58 58.8,58 ; 57.276,57.492 58.8,58 ; 57.276,58.508 58.8,58 ; 58.8,57.746 58.8,58.254 ; 61.492,1.524 62,0 ; 61.492,53.476 62,55 ; 61.746,0 62.254,0 ; 61.746,55 62.254,55 ; 62,22.301 62,0 ; 62,32.699 62,55 ; 62.508,1.524 62,0 ; 62.508,53.476 62,55
  text "58.8 (mm)" at 23.606,56.687 h1.52
  text "N" at 3.3,47.5 h2 r90
  text "L" at 3.3,30.5 h2 r90
  text "55 (mm)" at 63.313,22.555 h1.52 r90
Bottom Overlay:
  circle w0.254: c39.3,7.5 r1.2
  circle w0.254: c39.3,47.5 r1.2
  text "N" at 3.25,49.25 h2 r90
  text "L" at 3.25,32 h2 r90
  text "CZ201E" at 4,18 h1.52 r90
  text "V2.0" at 7,16 h1.52 r90